# Altium PCB Ornament.PcbDoc
Units mm, origin at the board's own origin, x right, y up, seen from the top; angles counter-clockwise.
Board outline 64.53 x 64.53 mm, 2 copper layers (Top Layer, Bottom Layer); 29 components, 18 nets, 83 pads, 27 vias.
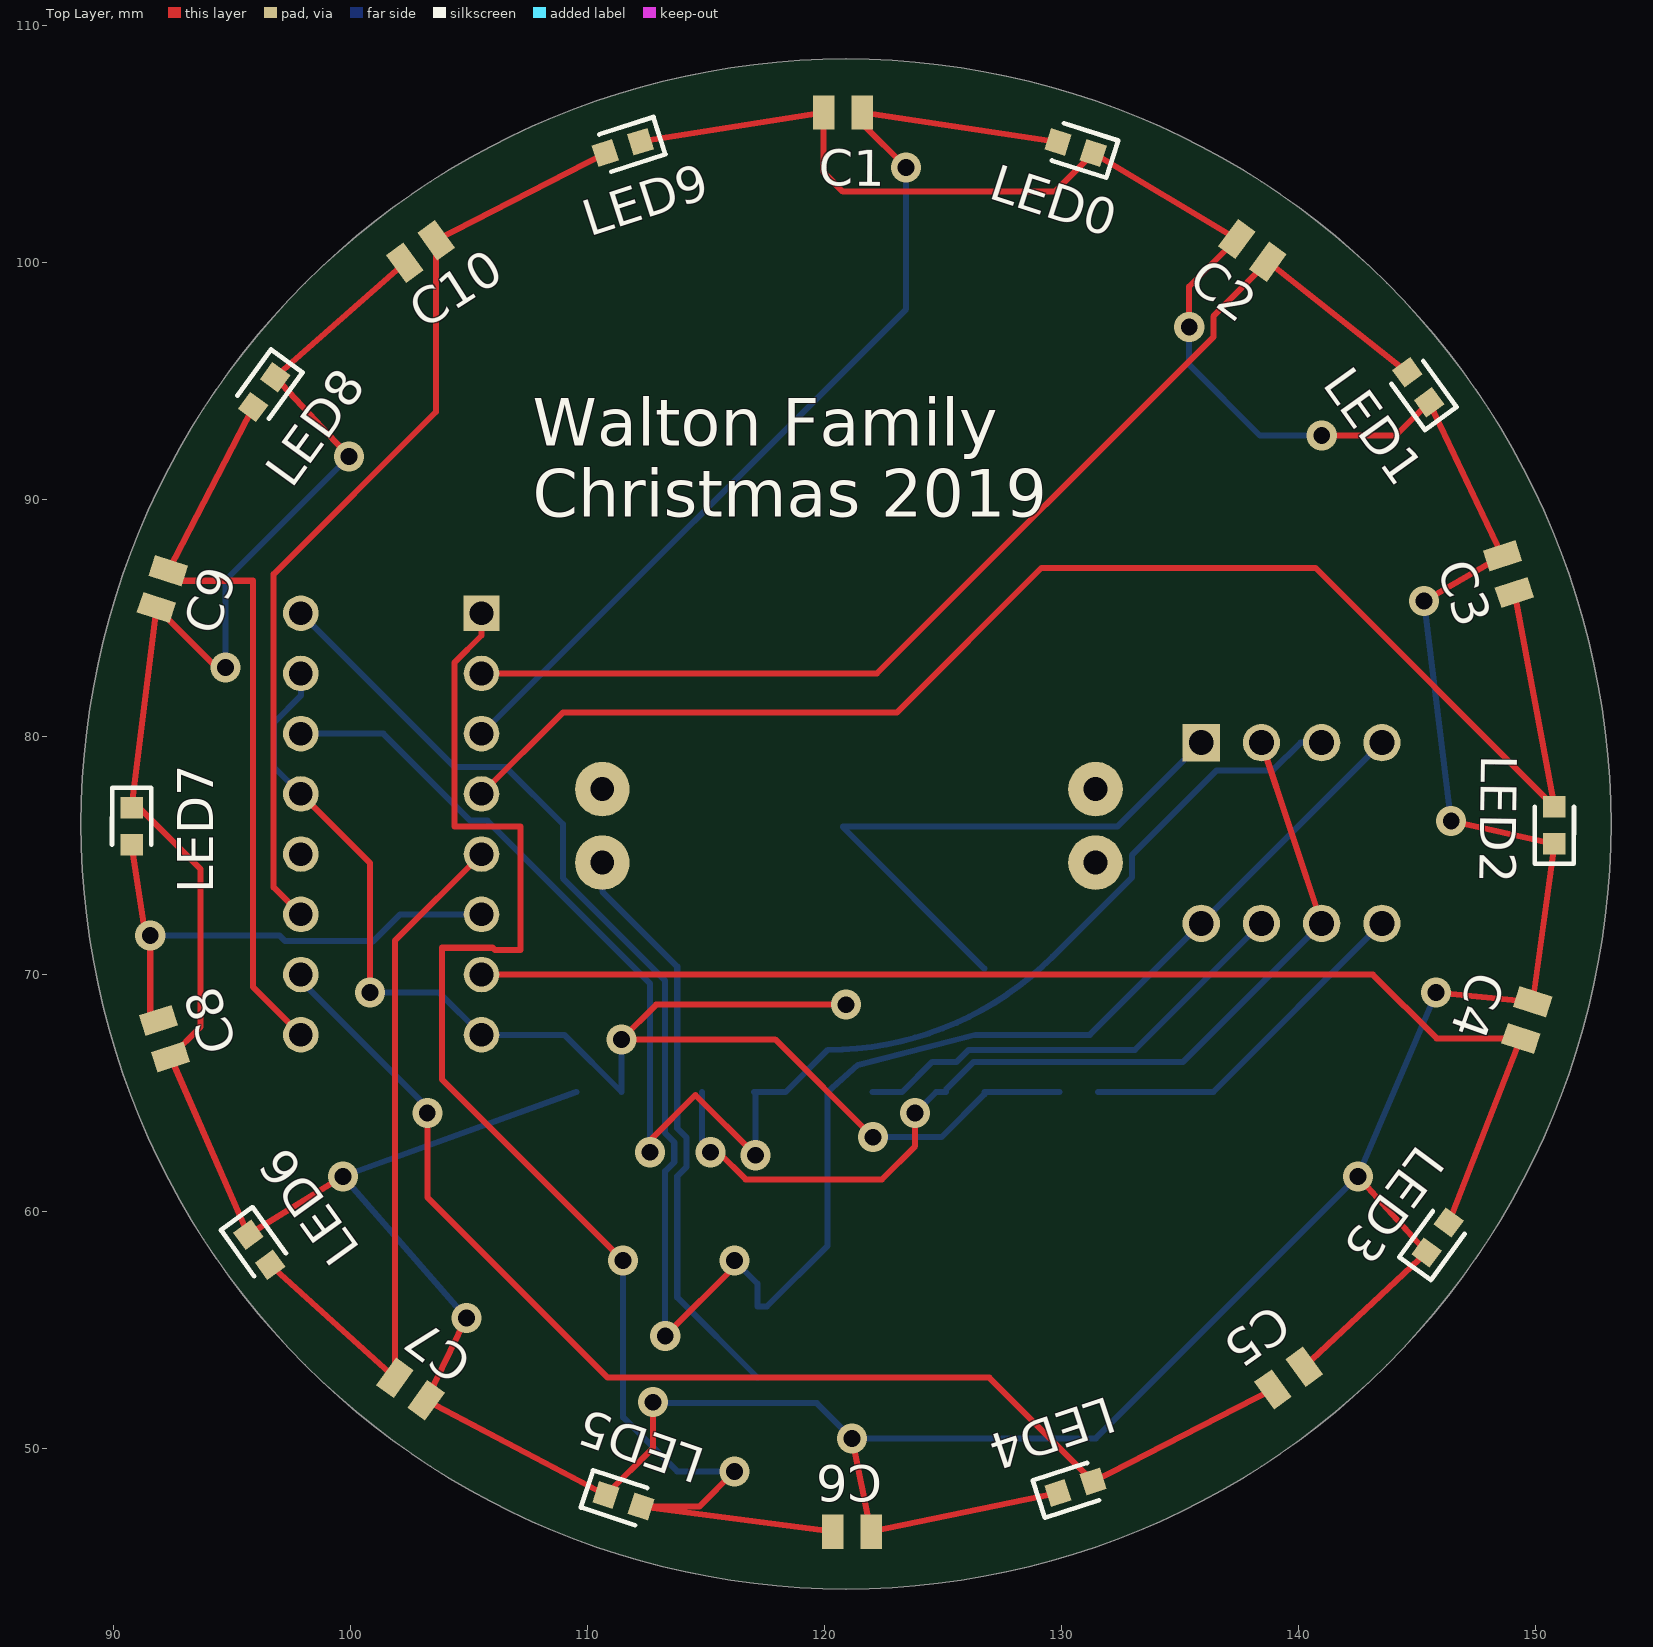
[diagram p0: Top Layer view]
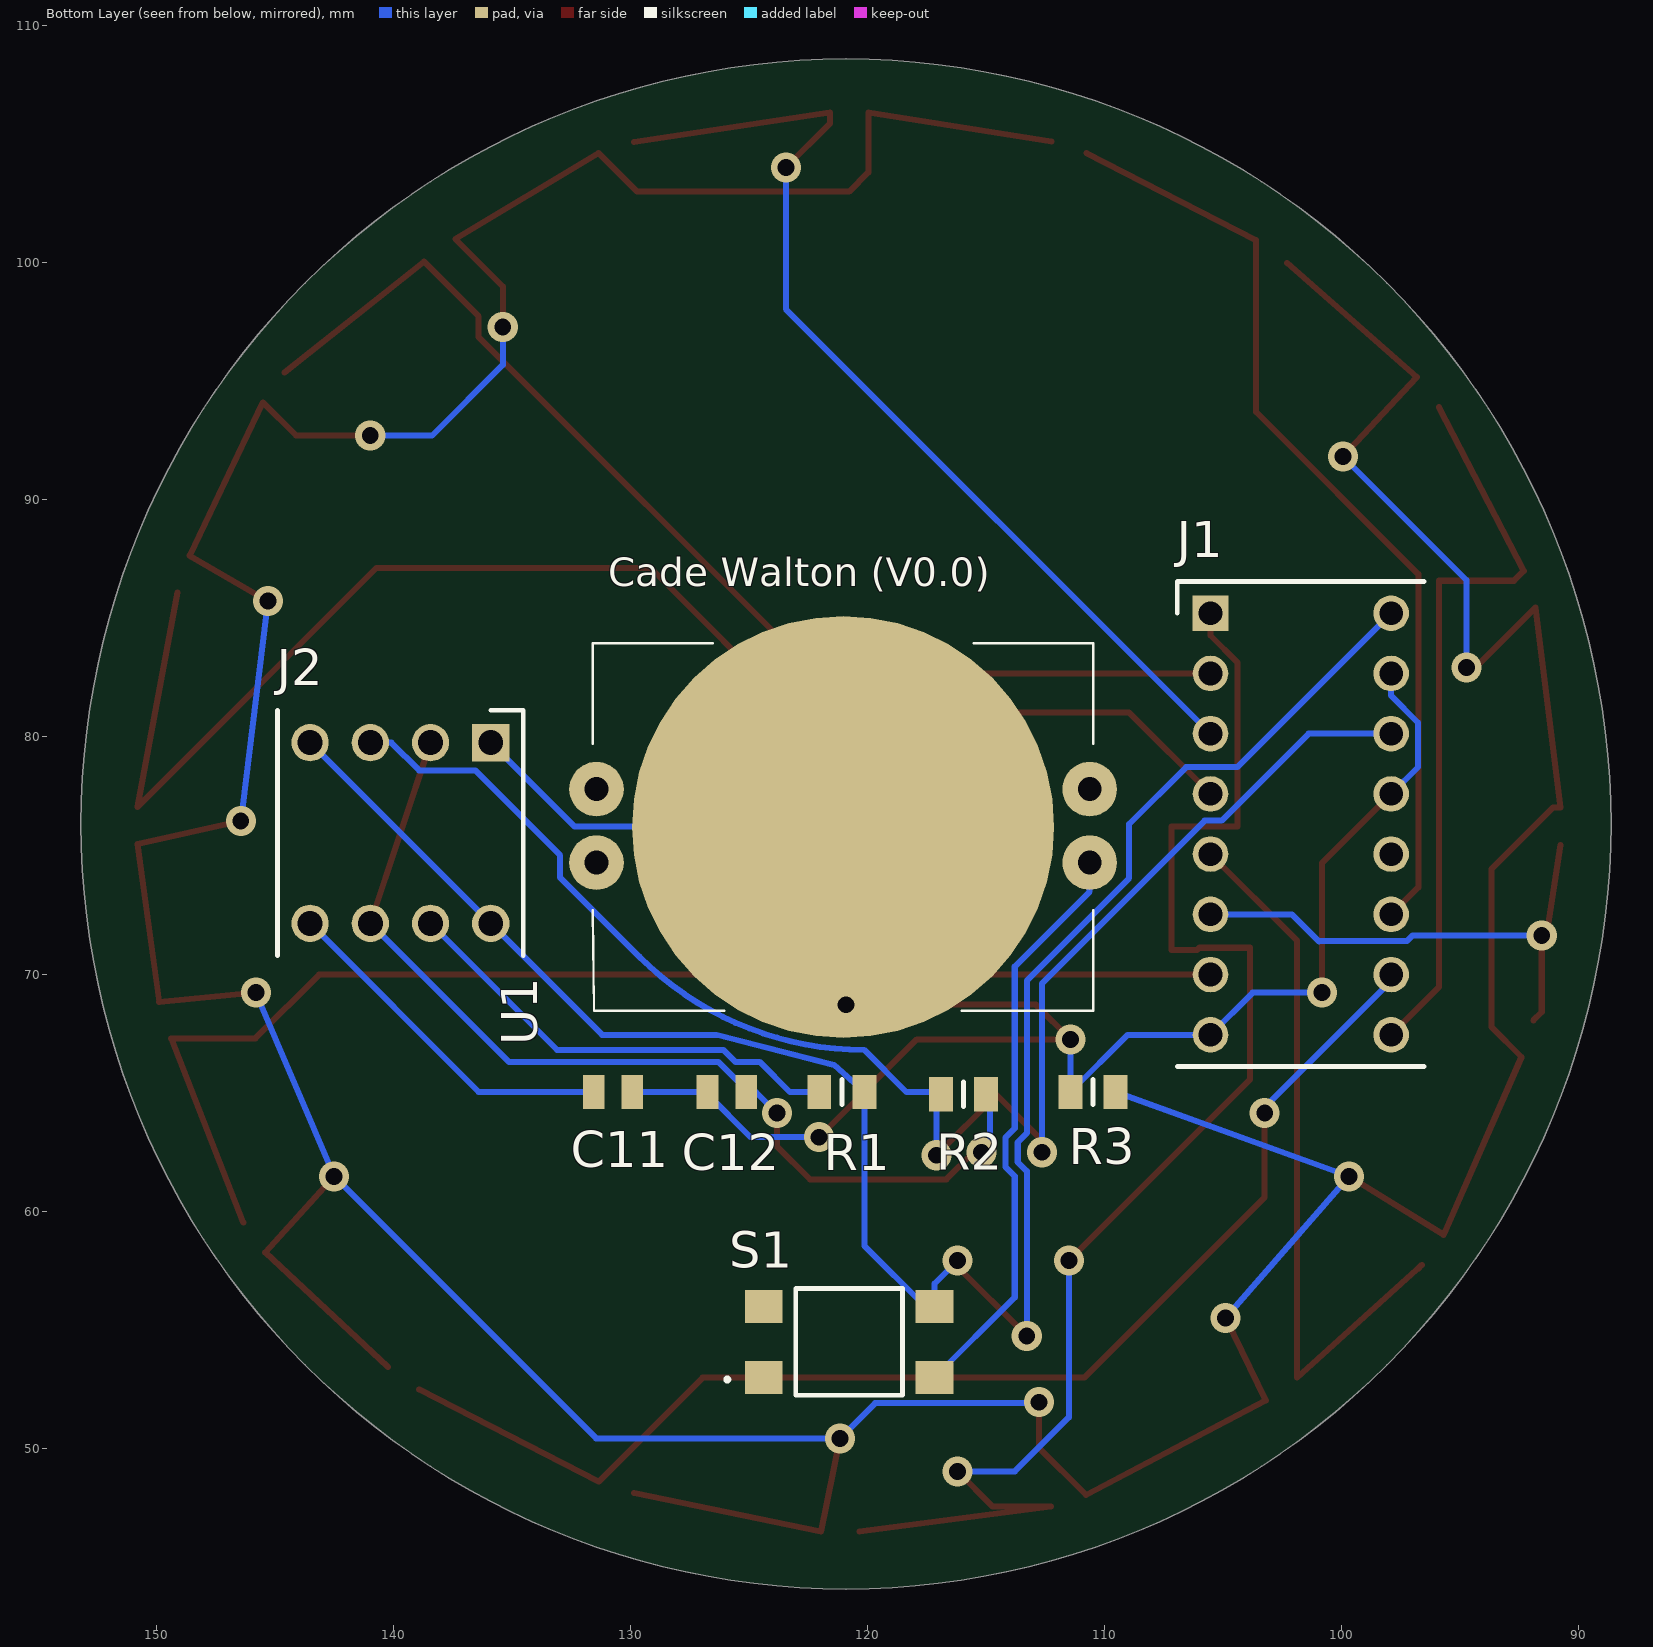
[diagram p1: Bottom Layer view, seen from below]
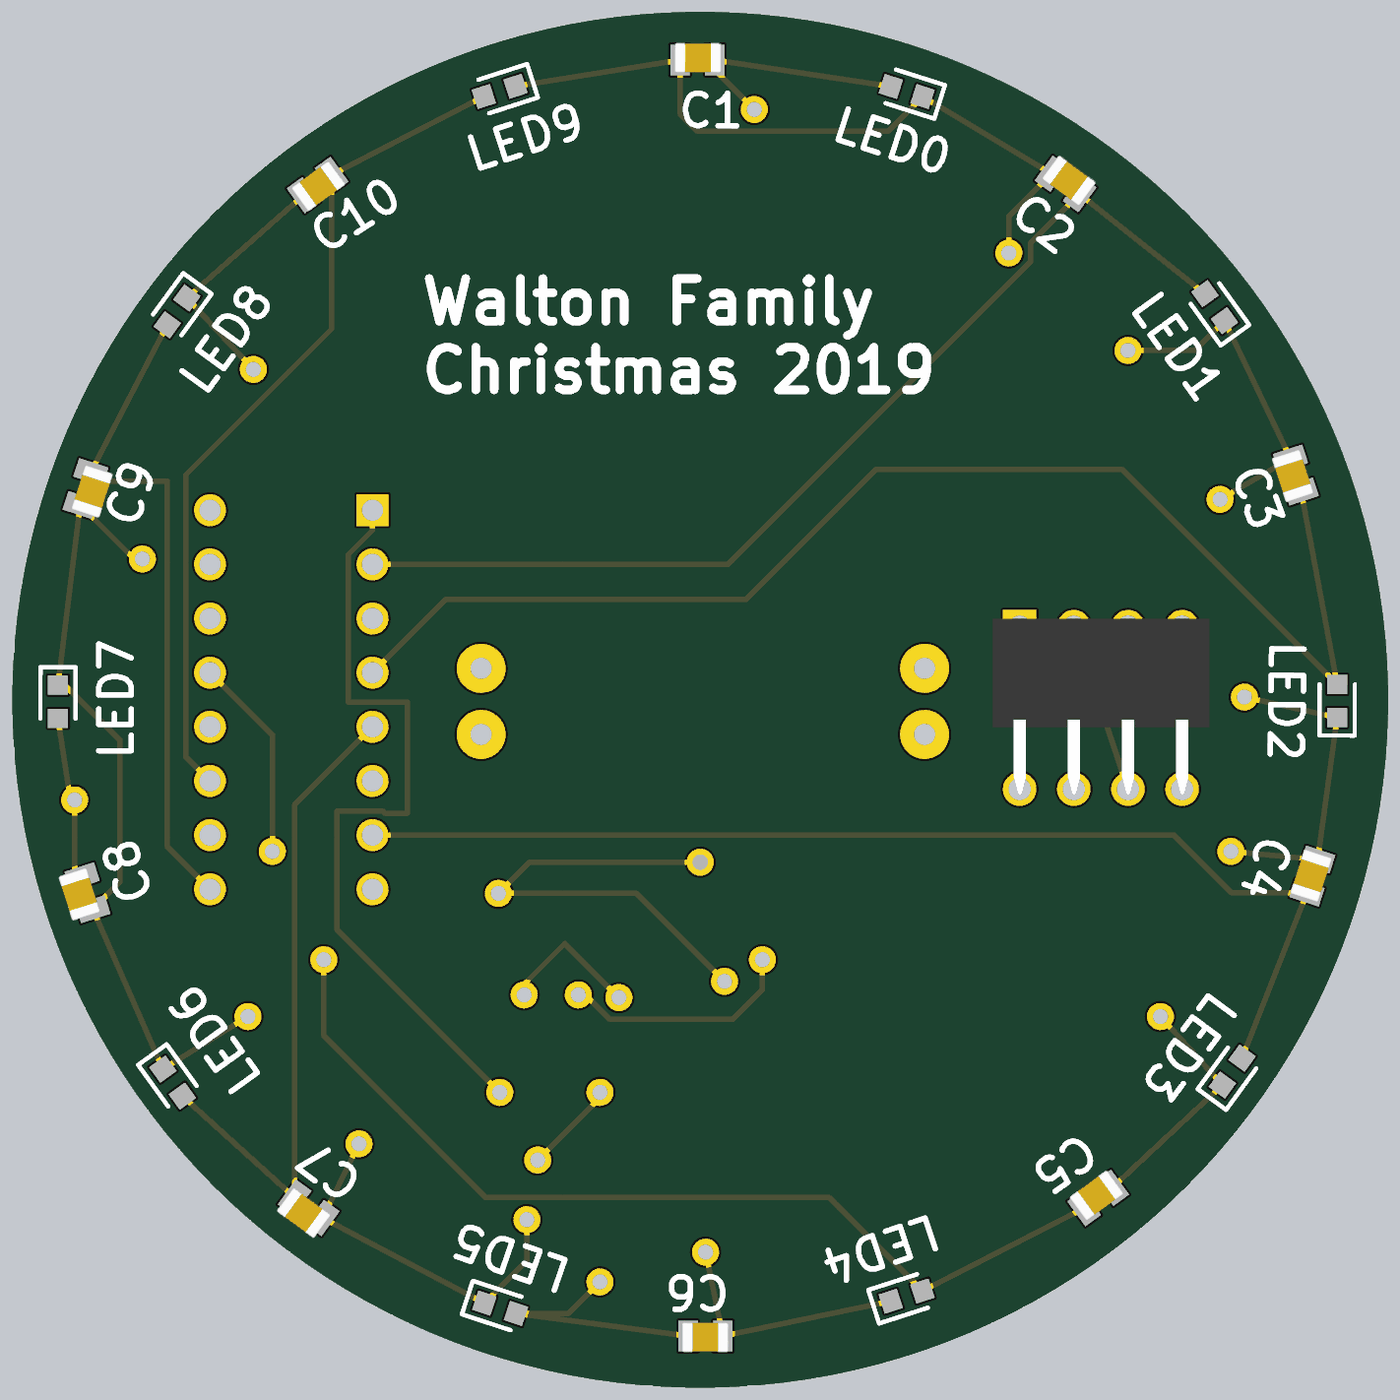
[diagram p2: 3D render of the assembled board from above, using the file's embedded part models]

## Layer stack, top to bottom
Top Solder: solder mask 0.0102, Solder Resist, Dk 3.5
Top Layer: signal copper 0.0356
Dielectric 1: dielectric 0.32, FR-4, Dk 4.8
Bottom Layer: signal copper 0.0356
Bottom Solder: solder mask 0.0102, Solder Resist, Dk 3.5

## Board outline
88.646,76.327 ccw(c120.908,76.327) 120.908,44.064 ccw(c120.908,76.327) 153.171,76.327 ccw(c120.908,76.327) 120.908,108.59 ccw(c120.908,76.327)

## Design rules (kind name [scope] priority, off if disabled: settings)
Clearance [All] p1: gap=0.254 ignorepadtopadclearanceinfootprint=FALSE except(0: Arc-Hole Track-Hole SMDPad-Hole THPad-Hole Via-Hole Fill-Hole Poly-Hole Region-Hole Text-Hole)
Height [All] p1 off: minheight=0 maxheight=25.4 prefheight=12.7
PolygonConnect [All] p1: connectstyle=Relief reliefconductorwidth=0.254 reliefentries=4 polygonreliefangle="90 Angle" airgapwidth=0.254
RoutingVias [All] p1: holewidth=0.711 width=1.27 viastyle="Through Hole" minholewidth=0.711 minwidth=1.27 maxholewidth=0.711 maxwidth=1.27
SolderMaskExpansion [All] p1: expansion=0.102
Width [All] p1: maxlimit=0.254 minlimit=0.254 preferedwidth=0.254
29 further rules are at their usual default settings.

## Components (designator, comment, footprint, x,y, rotation, side; value= is the part's Value field where it differs from the comment)
C1 "??" CAPC2013X140N 120.777,106.332 r0 top
C2 "??" CAPC2013X140N 138.044,100.52 r324 top
C3 "??" CAPC2013X140N 148.844,86.868 r288 top
C4 "??" CAPC2013X140N 149.62,68.057 r252 top
C5 "??" CAPC2013X140N 139.573,52.959 r216 top
C6 "??" CAPC2013X140N 121.158,46.482 r180 top
C7 "??" CAPC2013X140N 102.543,52.498 r144 top
C8 "??" CAPC2013X140N 92.17,67.275 r108 top
C9 "??" CAPC2013X140N 92.075,86.233 r72 top
C10 "??" CAPC2013X140N 102.962,100.471 r36 top
C11 "10uF" CAPC2013X140N 130.734,65.024 r0 bottom
C12 "10uF" CAPC2013X140N 125.933,65.024 r180 bottom
J1 "4017" DIPS762W80P254L2019H533Q16N 105.537,85.217 r180 bottom
J2 "A_08-LC-TT" DIPS762W61P254L1016H525Q8N 135.89,79.756 r270 bottom
LED0 "LTST-C191KRKT" LEDC1608X55N 130.61,104.851 r162.36 top
LED1 "LTST-C191KRKT" LEDC1608X55N 145.051,94.725 r125.85 top
LED2 "LTST-C191KRKT" LEDC1608X55N 150.782,76.251 r89.85 top
LED3 "LTST-C191KRKT" LEDC1608X55N 145.85,58.873 r53.85 top
LED4 "LTST-C191KRKT" LEDC1608X55N 130.569,48.35 r17.85 top
LED5 "LTST-C191KRKT" LEDC1608X55N 111.505,47.791 r341.85 top
LED6 "LTST-C191KRKT" LEDC1608X55N 96.15,58.386 r305.85 top
LED7 "LTST-C191KRKT" LEDC1608X55N 90.784,76.251 r269.85 top
LED8 "LTST-C191KRKT" LEDC1608X55N 96.381,94.558 r233.85 top
LED9 "LTST-C191KRKT" LEDC1608X55N 111.517,104.867 r197.85 top
R1 "10k" RESC2012X60N 121.081,65.024 r180 bottom
R2 "7.15k" RESC2012X60N 115.951,64.93 r180 bottom
R3 "10" RESC2012X60N 110.49,65.024 r180 bottom
S1 "Switch" TL3305AF160QG 120.777,54.483 r180 bottom
U1 "Battery Holder" BATHLD001THM 121.031,76.2 r0 bottom

## Footprints (in the part's own frame and the unit in brackets; to place one, negate y for a bottom-side part, rotate by r counter-clockwise, add the part's x,y. Pads: shape width x height; smd on the part's side, far side on the other; paste and mask are expansions set on the pad)
BATHLD001THM [mm]
  round 2.3 hole 1: 1(-10.4,1.5) 2(-10.4,-1.6) 3(10.4,-1.6) 4(10.4,1.5)
  round 17.8 smd: 5(0,0)
  silkscreen extent -10.55,-7.75 10.55,7.75, body extent -10.55,-7.75 10.55,7.75, height 1.27
CAPC2013X140N [mil]
  rect 36x57 smd: 1(-32,0) 2(32,0)
  body extent -43,-30 43,25, height 1743
DIPS762W61P254L1016H525Q8N [mm]
  rect 1.575x1.575 hole 1.05: 1(0,0)
  round 1.575 hole 1.05: 2(0,-2.54) 3(0,-5.08) 4(0,-7.62) 5(7.62,-7.62) 6(7.62,-5.08) 7(7.62,-2.54) 8(7.62,0)
  silkscreen extent -1.37,-8.99 8.99,1.37, body extent -0.38,-8.9 7.87,1.26, height 5.08
DIPS762W80P254L2019H533Q16N [mm]
  rect 1.5x1.5 hole 1: 1(0,0)
  round 1.5 hole 1: 2(0,-2.54) 3(0,-5.08) 4(0,-7.62) 5(0,-10.16) 6(0,-12.7) 7(0,-15.24) 8(0,-17.78) 9(7.62,-17.78) 10(7.62,-15.24) 11(7.62,-12.7) 12(7.62,-10.16) 13(7.62,-7.62) 14(7.62,-5.08) 15(7.62,-2.54) 16(7.62,0)
  silkscreen extent -1.4,-19.11 9.02,1.33
LEDC1608X55N [mm]
  rect 0.9x0.95 smd: 1(-0.762,0) 2(0.8,0)
  silkscreen extent -1.6,-0.82 0.8,0.82, body extent -1.14,-0.45 1.14,0.45, height 0.51
RESC2012X60N [mm]
  rect 1x1.45 smd: 1(-0.95,0) 2(0.95,0)
  silkscreen extent 0,-0.53 0,0.53, body extent -1,-0.63 1,0.63, height 1.27
TL3305AF160QG [mm]
  rect 1.6x1.4 smd: 1(-3.6,-1.5) 2(3.6,-1.5) 3(-3.6,1.5) 4(3.6,1.5)
  silkscreen extent -5.21,-2.25 2.25,2.25

## Part data
C1 C2 C3 C4 C5 C6 C7 C8 C9 C10 C11 C12: library part C0805C106K8PACTU, "Capacitor", Manufacturer_Name=Kemet, Mouser Part Number=80-C0805C106K8P, RS Part Number=8029850P, Allied_Number=70096892, Allied Price/Stock=https://www.alliedelec.com/kemet-c0805c106k8pactu/70096892/, Datasheet Link=http://componentsearchengine.com/Datasheets/3/C0805C106K8PACTU.pdf, Manufacturer_Part_Number=C0805C106K8PACTU, Mouser Price/Stock=https://www.mouser.com/Search/Refine.aspx?Keyword=80-C0805C106K8P, RS Price/Stock=http://uk.rs-online.com/web/p/products/8029850P
J1: library part 4816-3000-CP, "Connector", Manufacturer_Name=3M, Mouser Part Number=517-4816-3000-CP, Allied_Number=70237684, Allied Price/Stock=https://www.alliedelec.com/3m-4816-3000-cp/70237684/, Datasheet Link=https://rs.componentsearchengine.com/Datasheets/2/4816-3000-CP.pdf, Height=5.334mm, Manufacturer_Part_Number=4816-3000-CP, Mouser Price/Stock=https://www.mouser.com/Search/Refine.aspx?Keyword=517-4816-3000-CP
J2: "Connector", Manufacturer_Name="ASSMANN WSW components GmbH", Manufacturer_Part_Number="A 08-LC-TT", RS Part Number=6742435P, Datasheet Link=http://www.assmann-wsw.com/fileadmin/datasheets/ASS_0810_CO.pdf, Height=5.25mm, RS Price/Stock=http://uk.rs-online.com/web/p/products/6742435P
LED0 LED1 LED2 LED3 LED4 LED5 LED6 LED7 LED8 LED9: "LED", Manufacturer_Name=Lite-On, Mouser Part Number=859-LTST-C191KRKT, RS Part Number=1278415P, Datasheet Link=http://www.mouser.com/ds/2/239/S_110_LTST-C191KRKT-539838.pdf, Height=0.55mm, Manufacturer_Part_Number=LTST-C191KRKT, Mouser Price/Stock=https://www.mouser.com/Search/Refine.aspx?Keyword=859-LTST-C191KRKT, RS Price/Stock=http://uk.rs-online.com/web/p/products/1278415P
R1 R2 R3: library part ERA6AEB7151V, "Resistor", Manufacturer_Name=Panasonic, RS Part Number=7426134, Allied_Number=70360736, Allied Price/Stock=https://www.alliedelec.com/panasonic-era6aeb7151v/70360736/, Datasheet Link=https://industrial.panasonic.com/cdbs/www-data/pdf/RDM0000/AOA0000C307.pdf, Height=0.6mm, Manufacturer_Part_Number=ERA6AEB7151V, RS Price/Stock=https://uk.rs-online.com/web/p/products/7426134
S1: library part TL3305AF160QG, Manufacturer_Name=E-Switch, Mouser Part Number=612-TL3305AF160QG, Datasheet Link=http://spec_sheets.e-switch.com/specs/P010468.pdf, Manufacturer_Part_Number=TL3305AF160QG, Mouser Price/Stock=https://www.mouser.com/Search/Refine.aspx?Keyword=612-TL3305AF160QG
U1: library part BAT-HLD-001-THM, "Undefined or Miscellaneous", Manufacturer_Name="Linx Technologies", Mouser Part Number=712-BAT-HLD-001-THM, Datasheet Link="http://www.mouser.com/datasheet/2/238/BAT-HLD-001-THM Diagram-1175214.pdf", Height=4.2mm, Manufacturer_Part_Number=BAT-HLD-001-THM, Mouser Price/Stock=https://www.mouser.com/Search/Refine.aspx?Keyword=712-BAT-HLD-001-THM

## Via types
v1: diameter 1.27, hole 0.711, Top Layer to Bottom Layer, 27 vias

## Nets (pads, with @x,y where several pads share a name; then routed paths per layer and width w, separated by ;. In a path a pad name is that pad's centre, name@x,y a point inside that pad or via, vN(x,y) a via of type N, cw(c..) or ccw(c..) an arc to the next point about the centre after c; other vN are vias at no path point)
Clock: J1.14 J2.3 R2.1 | length 65.7
  Top Layer w0.254: v1(112.649,62.484) 112.649,62.992 114.554,64.897 v1(117.094,62.357)
  Bottom Layer w0.254: J1.14 101.398,80.137 105.069,76.466 105.779,76.466 112.649,69.596 v1(112.649,62.484) ; v1(117.094,62.357) 117.094,64.958 117.028,65.024 118.367,65.024 120.145,66.802 ccw(c120.145,80.209) 129.625,70.729 132.962,74.066 132.962,75.006 136.544,78.587 138.914,78.587 140.083,79.756 J2.3
GND: C11.1 C12.1 J1.8 J1.13 J1.15 J2.1 R3.1 U1.5 | length 86.5
  Top Layer w0.254: J1.13 100.838,74.676 v1(100.838,69.215) ; v1(120.908,68.707) 112.903,68.707 v1(111.44,67.244) 117.922,67.244 v1(122.047,63.119)
  Bottom Layer w0.254: J1.13 96.786,78.728 96.786,80.605 97.917,81.736 J1.15 ; v1(100.838,69.215) 103.759,69.215 J1.8 109.027,67.437 R3.1 v1(111.44,67.244) ; v1(120.908,68.707) U1.5@121.031,68.83 ; v1(122.047,63.119) 124.935,63.119 126.746,64.93 C12.1 C11.1 ; U1.5@126.746,70.231 120.777,76.2 120.777,76.231 132.365,76.231 J2.1
L0: C1.2 J1.3 LED0.2 | length 42.7
  Top Layer w0.254: v1(123.444,104.013) 121.59,105.867 C1.2 LED0.2
  Bottom Layer w0.254: J1.3 123.444,98.044 v1(123.444,104.013)
L1: C2.2 J1.2 LED1.2 | length 48.4
  Top Layer w0.254: J1.2 122.214,82.677 136.398,96.861 136.398,97.739 C2.2 LED1.2
L2: C3.2 J1.4 LED2.2 | length 62.6
  Top Layer w0.254: J1.4 108.966,81.026 123.052,81.026 129.148,87.122 140.713,87.122 LED2.2 C3.2
L3: C4.2 J1.7 LED3.2 | length 53.3
  Top Layer w0.254: J1.7 143.129,69.977 145.822,67.284 C4.2 LED3.2
L4: C5.2 J1.10 LED4.2 | length 53.2
  Top Layer w0.254: v1(103.251,64.135) 103.251,60.579 110.854,52.976 126.949,52.976 LED4.2 C5.2
  Bottom Layer w0.254: J1.10 97.917,69.723 103.251,64.389 v1(103.251,64.135)
L5: C6.2 J1.1 LED5.2 | length 62.1
  Top Layer w0.254: J1.1 105.537,84.276 104.406,83.145 104.406,76.212 107.176,76.212 107.176,71.005 106.108,71.005 106.005,71.108 103.874,71.108 103.874,65.544 v1(111.506,57.912) ; v1(116.205,49.022) 114.724,47.541 LED5.2 C6.2
  Bottom Layer w0.254: v1(111.506,57.912) 111.506,51.308 113.792,49.022 v1(116.205,49.022)
L6: C7.2 J1.5 LED6.2 | length 30.9
  Top Layer w0.254: LED6.2@96.8,57.557 LED6.2 C7.2 101.885,71.405 J1.5
L7: C8.2 J1.6 LED7.2 | length 22
  Top Layer w0.254: LED7.2 v1@91.35,71.75 ; v1(91.567,71.628) 91.567,68.4 C8.2
  Bottom Layer w0.254: v1(91.567,71.628) 97.011,71.628 97.253,71.386 100.953,71.386 100.965,71.374 102.108,72.517 J1.6
L8: C9.2 J1.9 LED8.2 | length 31.5
  Top Layer w0.254: LED8.2 C9.2 92.746,86.586 95.91,86.586 95.91,69.444 J1.9
L9: C10.2 J1.11 LED9.2 | length 39.8
  Top Layer w0.254: J1.11 96.774,73.66 96.774,86.868 103.619,93.713 C10.2 LED9.2
NetC1_1: C1.1 C2.1 C3.1 C4.1 C5.1 C6.1 C7.1 C8.1 C9.1 C10.1 LED0.1 LED1.1 LED2.1 LED3.1 LED4.1 LED5.1 LED6.1 LED7.1 LED8.1 LED9.1 R3.2 | length 246.5
  Top Layer w0.254: v1(94.742,82.931) 94.353,82.931 C9.1 LED7.1 91.1,77.013 93.691,74.422 93.691,67.772 C8.1 LED6.1 v1(99.695,61.468) ; v1(99.949,91.821) LED8.1 C10.1 ; v1(104.902,55.499) C7.1 LED5.1 112.776,50.023 v1(112.776,51.943) ; LED9.1 C1.1 119.964,103.81 120.777,102.997 129.713,102.997 LED0.1 C2.1 135.382,98.993 v1(135.382,97.282) ; v1(121.158,50.419) C6.1 LED4.1 ; C5.1 LED3.1 v1(142.494,61.468) ; v1(140.97,92.71) 144.1,92.71 LED1.1 C3.1 v1(145.288,85.725) ; v1(145.796,69.215) C4.1 LED2.1 v1(146.431,76.454)
  Bottom Layer w0.254: v1(94.742,82.931) 94.742,86.614 v1(99.949,91.821) ; v1(104.902,55.499) v1(99.695,61.468) R3.2 ; v1(112.776,51.943) 112.817,51.902 119.675,51.902 v1(121.158,50.419) 131.445,50.419 v1(142.494,61.468) v1(145.796,69.215) ; v1(135.382,97.282) 135.382,95.691 138.363,92.71 v1(140.97,92.71) ; v1(145.288,85.725) v1(146.431,76.454)
NetC11_2: C11.2 J2.5 | length 14.9
  Bottom Layer w0.254: C11.2 136.398,65.024 J2.5
NetC12_2: C12.2 J2.2 J2.6 R2.2 | length 42.3
  Top Layer w0.254: v1(115.189,62.484) 115.53,62.484 116.673,61.341 122.428,61.341 123.825,62.738 v1(123.825,64.135) ; J2.2 J2.6
  Bottom Layer w0.254: R2.2@114.835,65.024 114.835,62.992 115.189,62.638 v1(115.189,62.484) ; v1(123.825,64.135) 124.714,65.024 C12.2 125.12,65.118 126.296,66.294 135.128,66.294 J2.6
NetJ2_7: J2.7 R1.1 | length 19.3
  Bottom Layer w0.254: R1.1 123.277,65.024 124.547,66.294 125.578,66.294 126.086,66.802 133.096,66.802 J2.7
NetS1_2: S1.2 U1.1 | length 24.7
  Bottom Layer w0.254: U1.1 110.631,73.475 113.792,70.314 113.792,63.496 114.173,63.115 114.173,61.853 113.792,61.472 113.792,56.368 S1.2
VCC: J1.16 J2.4 J2.8 R1.2 S1.4 | length 84.8
  Top Layer w0.254: v1(113.284,54.737) 116.332,57.785 v1(116.205,57.912)
  Bottom Layer w0.254: J1.16 104.406,78.728 106.565,78.728 108.966,76.327 108.966,74.041 113.284,69.723 113.284,63.286 113.665,62.905 113.665,62.063 113.284,61.682 v1(113.284,54.737) ; v1(116.205,57.912) 117.177,56.94 S1.4 117.578,55.983 120.131,58.536 R1.2 121.412,66.167 126.365,67.437 131.191,67.437 J2.8 J2.4
pads on no net: J1.12 S1.1 S1.3 U1.2 U1.3 U1.4

## Other copper
Bottom Layer:
  region: 105.537,77.597
  region: 112.903,78.867

## Silkscreen, mask and mechanical layers (free items; w line width, h text height)
Top Overlay:
  text "Walton Family  / Christmas 2019" at 107.696,89.281 h2
Bottom Overlay:
  text "Cade Walton (V0.0)" at 130.937,86.36 h1.2
Mechanical 4:
  circle w0.254: c120.908,76.327 r32.263